# Altium PCB Payload_ProbablyStable.PcbDoc
Units mm, origin at the board's own origin, x right, y up, seen from the top; angles counter-clockwise.
Board outline 47.6 x 56 mm, 2 copper layers (Top Layer, Bottom Layer); 28 components, 33 nets, 124 pads, 42 vias.
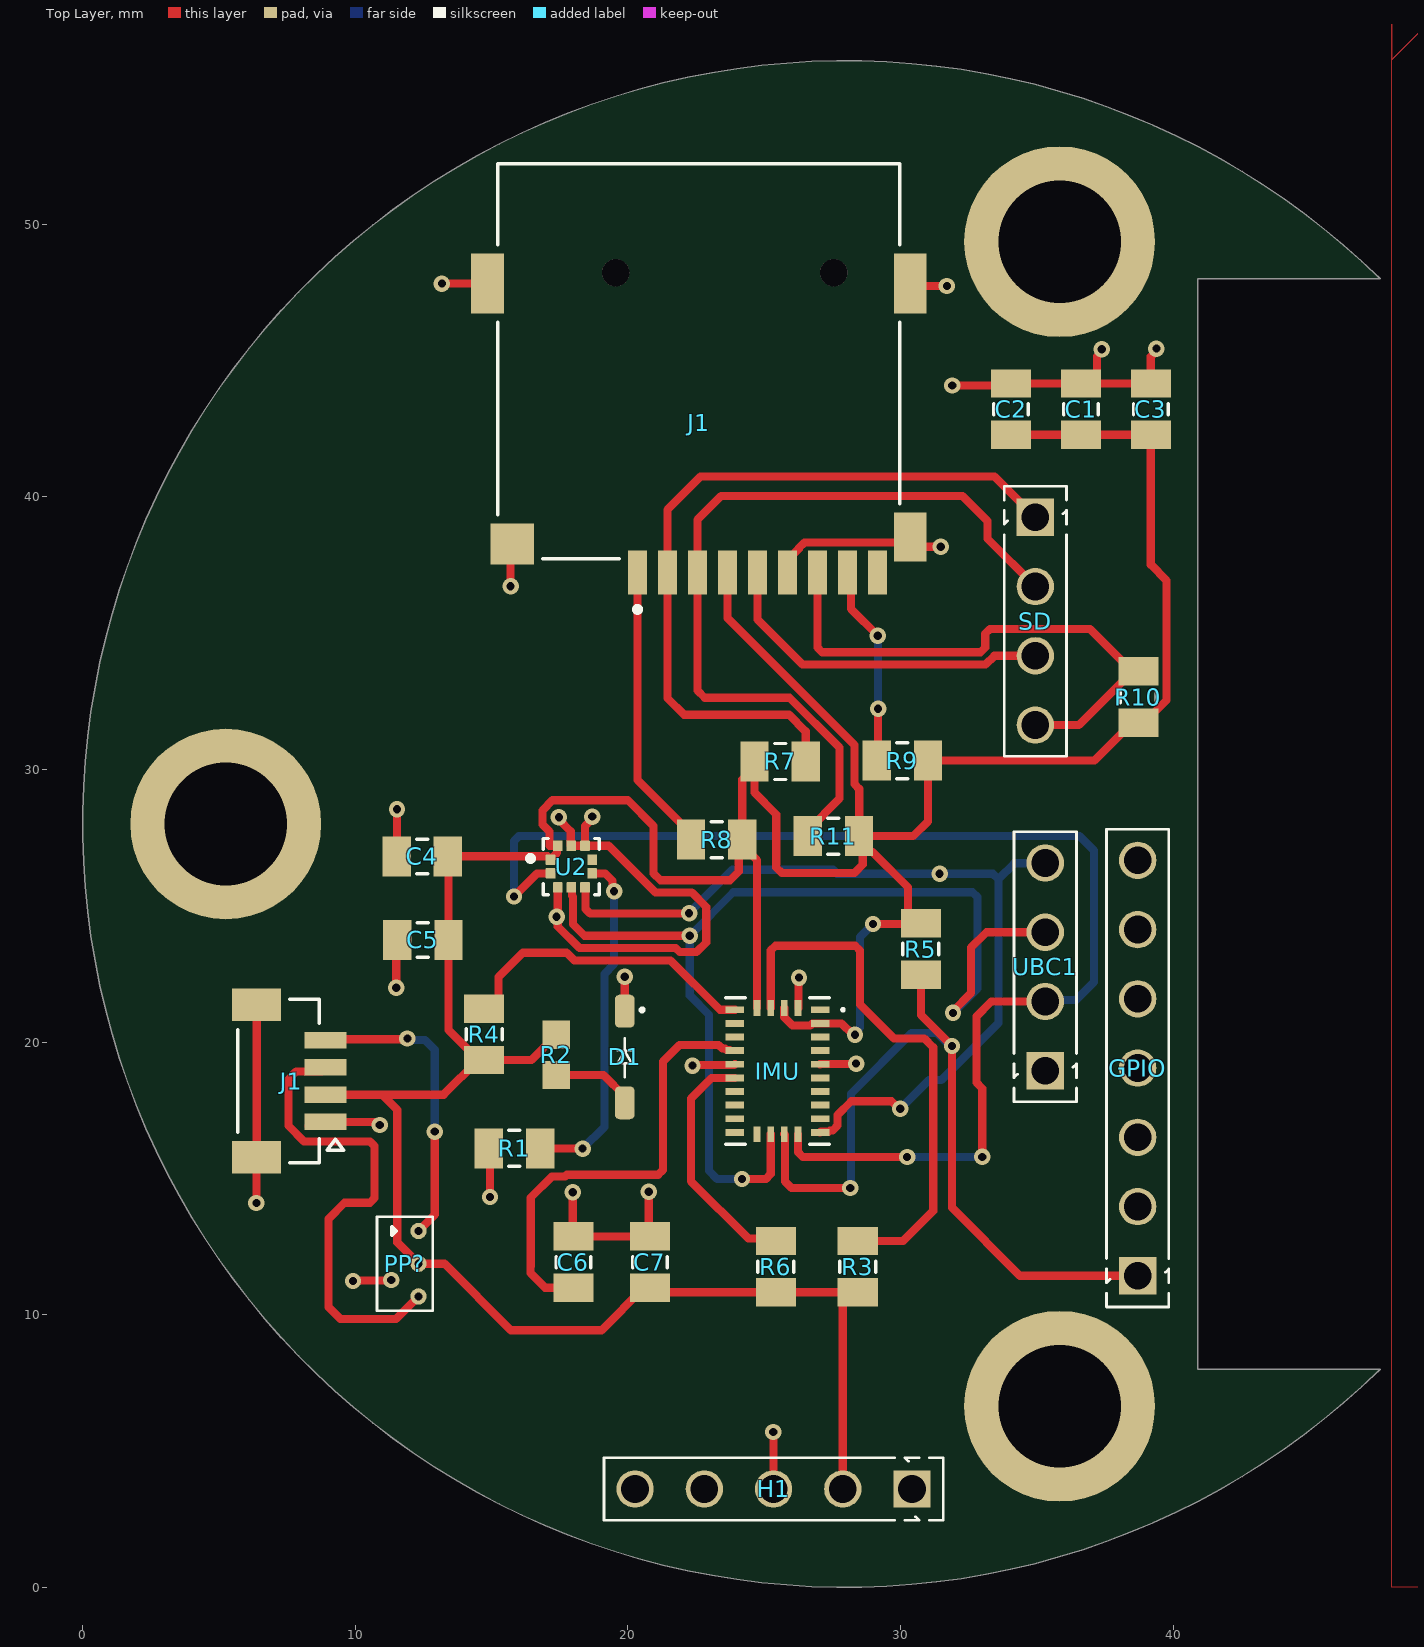
[diagram p0: Top Layer view]
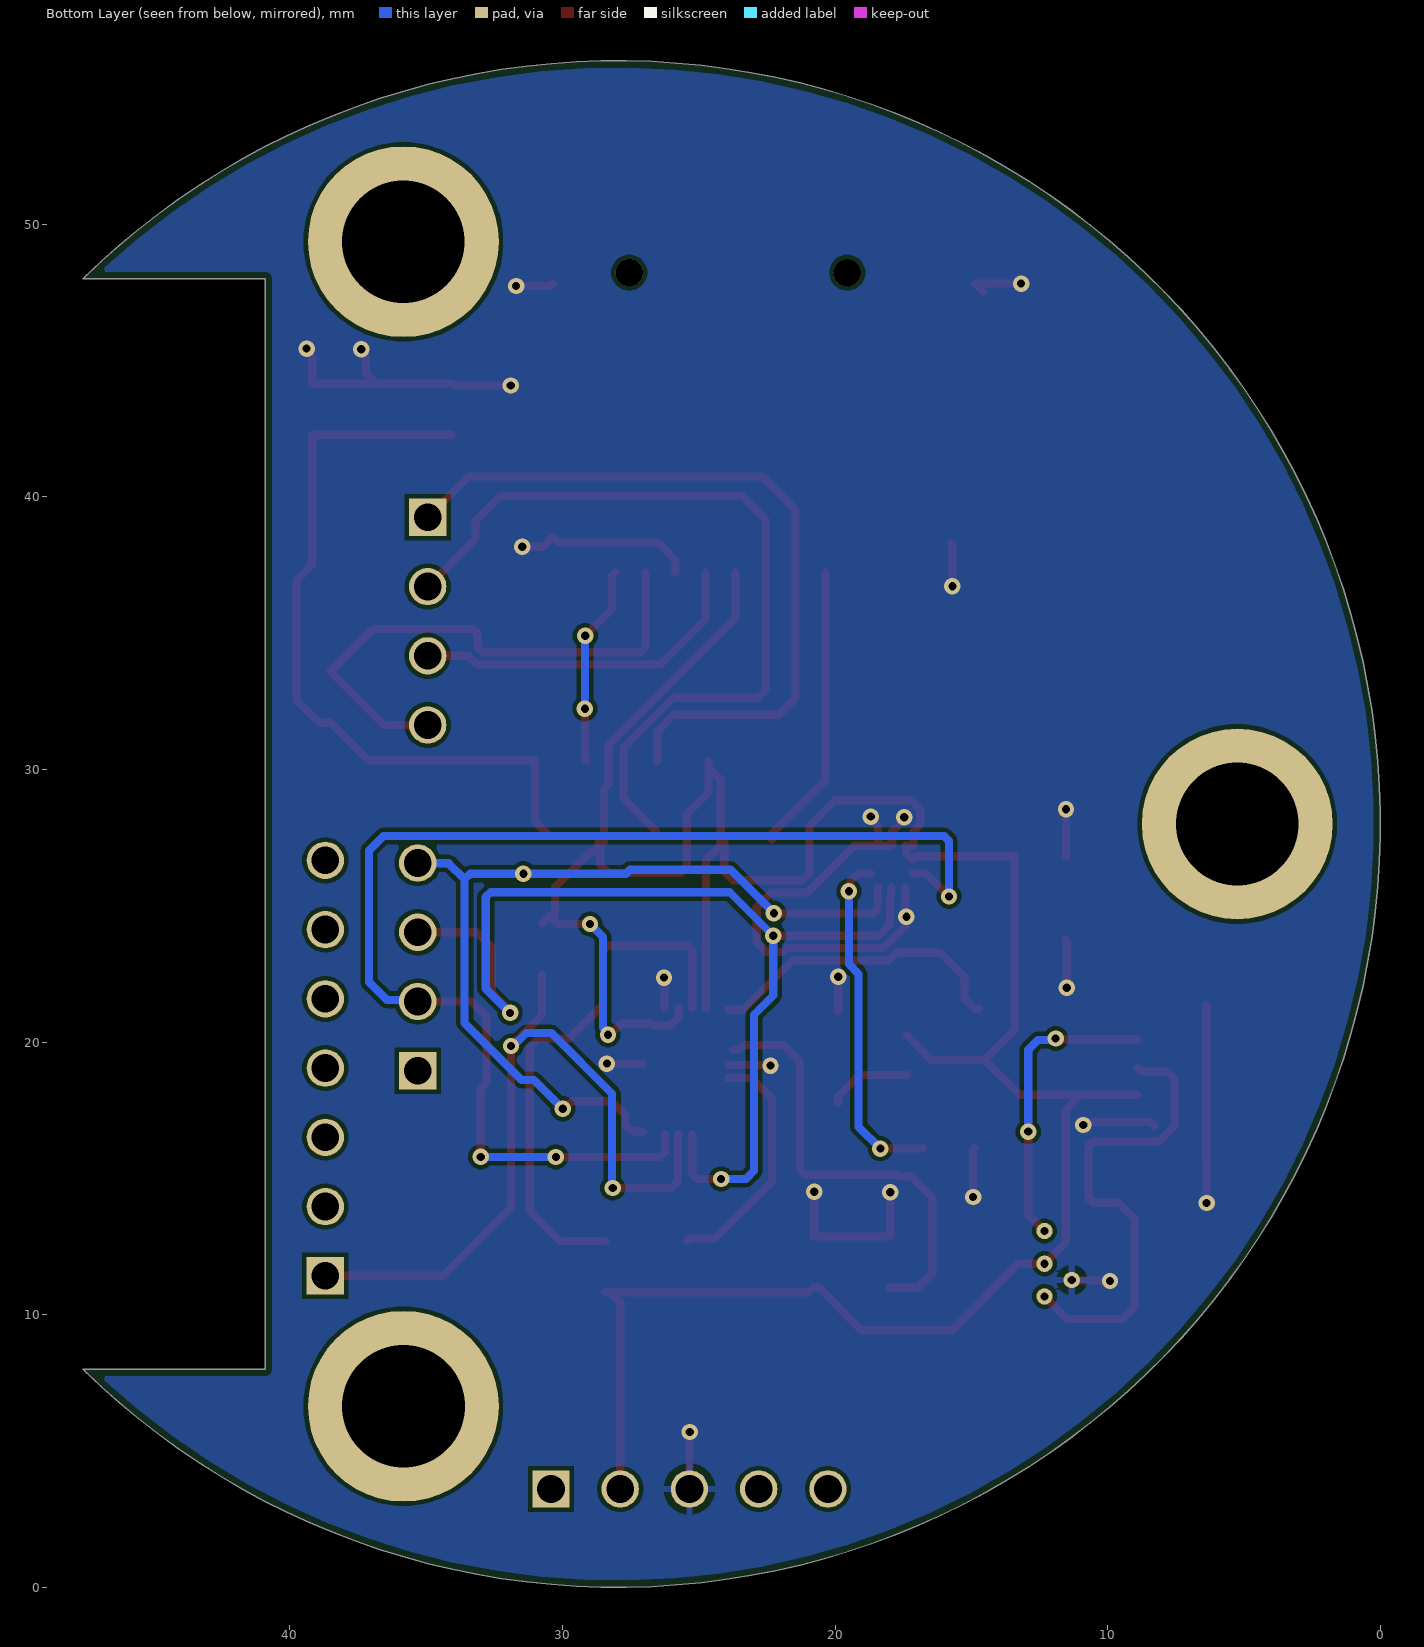
[diagram p1: Bottom Layer view, seen from below]

## Layer stack, top to bottom
Top Solder: solder mask 0.0102, Solder Resist, Dk 3.5
Top Layer: signal copper 0.0356
Dielectric 1: dielectric 0.32, FR-4, Dk 4.8
Bottom Layer: signal copper 0.0356
Bottom Solder: solder mask 0.0102, Solder Resist, Dk 3.5

## Board outline
47.596,8 cw(c28,28) 47.596,48 47.6,48 40.913,48 40.913,8

## Design rules (kind name [scope] priority, off if disabled: settings)
BoardOutlineClearance [All] p1: gap=0.254 ignorepadtopadclearanceinfootprint=FALSE except(0: Arc-SplitContinuation Track-SplitContinuation SMDPad-SplitContinuation THPad-SplitContinuation Via-SplitContinuation Fill-SplitContinuation Poly-SplitContinuation Region-SplitContinuation Text-SplitContinuation)
Clearance [All] p1: gap=0.152 ignorepadtopadclearanceinfootprint=FALSE
ComponentClearance [All] p1: gap=0.1 collisioncheckmode=3 verticalgap=0.254 showdistances=FALSE
HoleSize [All] p1: absolutevalues=TRUE maxlimit=6.2 minlimit=0.3 maxpercent=80.000 minpercent=20.000
MinimumAnnularRing [All] p1: minimumring=0.15
MinimumSolderMaskSliver [All] p1: minsoldermaskwidth=0.1
PolygonConnect ViaConnect [IsVia] p1: connectstyle=Direct reliefconductorwidth=0.254 reliefentries=4 polygonreliefangle="90 Angle" airgapwidth=0.254
PolygonConnect [All] p2: connectstyle=Relief reliefconductorwidth=0.254 reliefentries=4 polygonreliefangle="90 Angle" airgapwidth=0.254
RoutingVias [All] p1: holewidth=0.3 width=0.6 viastyle="Through Hole" minholewidth=0.3 minwidth=0.5 maxholewidth=1 maxwidth=5
SilkToSilkClearance [All] p1: silktosilkclearance=0.1
SilkToSolderMaskClearance [IsPad] p1: minsilkscreentomaskgap=0.1 clearancetoexposedcopper=TRUE
SolderMaskExpansion [All] p1: expansion=0.051 istentingtop=FALSE
SupplyNets "Schematic Supply Nets_3" [InNet('P6.3 / BARO_INT')] p1: voltage=0.000
SupplyNets "Schematic Supply Nets_27" [InNet('Reset/SBW_TDIO')] p2: voltage=0.000
SupplyNets "Schematic Supply Nets_26" [InNet('SBW_TCK')] p3: voltage=0.000
SupplyNets "Schematic Supply Nets_25" [InNet('SD_MISO')] p4: voltage=0.000
SupplyNets "Schematic Supply Nets_24" [InNet('SD_CLK')] p5: voltage=0.000
SupplyNets "Schematic Supply Nets_23" [InNet('GPIO2.7')] p6: voltage=0.000
SupplyNets "Schematic Supply Nets_22" [InNet('UCB1_STE')] p7: voltage=0.000
SupplyNets "Schematic Supply Nets_21" [InNet('P1.4 / SD_CS')] p8: voltage=0.000
SupplyNets "Schematic Supply Nets_20" [InNet('GPIO3.6')] p9: voltage=0.000
SupplyNets "Schematic Supply Nets_19" [InNet('P3.5 / SD_CardDetect')] p10: voltage=0.000
SupplyNets "Schematic Supply Nets_18" [InNet('GPIO3.7')] p11: voltage=0.000
SupplyNets "Schematic Supply Nets_17" [InNet('GPIO2.6')] p12: voltage=0.000
SupplyNets "Schematic Supply Nets_16" [InNet('GPIO6.0')] p13: voltage=0.000
SupplyNets "Schematic Supply Nets_15" [InNet('SD_MOSI')] p14: voltage=0.000
SupplyNets "Schematic Supply Nets_14" [InNet('GPIO6.1')] p15: voltage=0.000
SupplyNets "Schematic Supply Nets_13" [InNet('UCB1_CLK')] p16: voltage=0.000
SupplyNets "Schematic Supply Nets_11" [InNet('UCB1_MISO/SCL')] p17: voltage=0.000
SupplyNets "Schematic Supply Nets_10" [InNet('P6.2 / BMP_ADR')] p18: voltage=0.000
SupplyNets "Schematic Supply Nets_9" [InNet('GPIO2.3')] p19: voltage=0.000
SupplyNets "Schematic Supply Nets_7" [InNet('P3.6')] p20: voltage=0.000
SupplyNets "Schematic Supply Nets_6" [InNet('Vbat')] p21: voltage=0.000
SupplyNets "Schematic Supply Nets_5" [InNet('3V3')] p22: voltage=0.000
SupplyNets "Schematic Supply Nets_4" [InNet('UCB1_MOSI/SDA')] p23: voltage=0.000
SupplyNets "Schematic Supply Nets_2" [InNet('5V')] p24: voltage=0.000
SupplyNets "Schematic Supply Nets_1" [InNet('1V8')] p25: voltage=0.000
SupplyNets "Schematic Supply Nets" [InNet('GND')] p26: voltage=0.000
Width [All] p1: maxlimit=25.4 minlimit=0.15 preferedwidth=0.3
25 further rules are at their usual default settings.

## Classes and differential pairs
component class Payload: C1 C2 C3 C4 C5 C6 C7 D1 GPIO H1 IMU PP? R1 R2 R3 R4 R5 R6 R7 R8 R9 R10 R11 SD U2 UBC1

## Components (designator, comment, footprint, x,y, rotation, side; value= is the part's Value field where it differs from the comment)
C1 "22uF" CAPACITOR_0805_2012M-70N 36.624,43.218 r270 top
C2 "22uF" CAPACITOR_0805_2012M-70N 34.055,43.22 r270 top
C3 "22uF" CAPACITOR_0805_2012M-70N 39.182,43.218 r270 top
C4 "0.1uF" CAPACITOR_0805_2012M-70N 12.459,26.814 r0 top
C5 "0.1uF" CAPACITOR_0805_2012M-70N 12.48,23.751 r0 top
C6 "0.1uF" CAPACITOR_0805_2012M-70N 18.001,11.932 r270 top
C7 "0.1uF" CAPACITOR_0805_2012M-70N 20.807,11.932 r270 top
D1 "1N4148W-TP" SOD123-1.35mm-N 19.886,19.453 r270 top
GPIO "0530470710" HEADER_2.54MM_1x7PIN 38.702,19.047 r90 top
H1 "SSQ-105-03-S-S" HEADER_2.54MM_1x5PIN 25.344,3.607 r180 top
IMU "BNO085" IC_BNO085 25.489,18.937 r270 top
J1 "MSD-4-A" CUI_MSD-4-A 22.603,44.974 r180 top
J1 "5015680407" MOLEX_5013310407 7.37,18.571 r270 top
PP? "Headerless Pogo Holes 4-pin" POGO_4_PIN_HEADER 11.82,11.872 r270 top
R1 "10K" Resistor_0805_2012M-50N 15.84,16.103 r0 top
R2 "10K" RESC1607X60N 17.373,19.529 r90 top
R3 "10K" Resistor_0805_2012M-50N 28.434,11.765 r90 top
R4 "10K" Resistor_0805_2012M-50N 14.73,20.284 r90 top
R5 "10K" Resistor_0805_2012M-50N 30.751,23.414 r270 top
R6 "10K" Resistor_0805_2012M-50N 25.427,11.766 r270 top
R7 "4.7k" Resistor_0805_2012M-50N 25.583,30.293 r180 top
R8 "4.7k" Resistor_0805_2012M-50N 23.258,27.429 r0 top
R9 "4.7k" Resistor_0805_2012M-50N 30.07,30.328 r0 top
R10 "4.7k" Resistor_0805_2012M-50N 38.723,32.657 r270 top
R11 "4.7k" Resistor_0805_2012M-50N 27.54,27.554 r0 top
SD "Header 4" HEADER_2.54MM_1x4PIN 34.946,35.44 r270 top
U2 "BMP388" PQFN50P200X200X80-10N 17.928,26.439 r0 top
UBC1 "Header 4" HEADER_2.54MM_1x4PIN 35.311,22.76 r90 top

## Footprints (in the part's own frame and the unit in brackets; to place one, negate y for a bottom-side part, rotate by r counter-clockwise, add the part's x,y. Pads: shape width x height; smd on the part's side, far side on the other; paste and mask are expansions set on the pad)
CAPACITOR_0805_2012M-70N [mm] "Capacitor, 0805 (2012 metric), 0.7mm high, nominal pads,"
  rect 1.04x1.47 smd mask+0.051: 1(-0.94,0) 2(0.94,0)
  silkscreen extent -0.2,-0.64 0.2,0.64, body extent -1,-0.73 1,0.73, height 1.23
CUI_MSD-4-A [mm]
  rect 0.7x1.6 smd: 1(2.25,7.75) 2(1.15,7.75) 3(0.05,7.75) 4(-1.05,7.75) 5(-2.15,7.75) 6(-3.25,7.75) 7(-4.35,7.75) 8(-5.45,7.75) CD(-6.55,7.75)
  rect 1.2x1.8 smd: G1(-7.75,6.45)
  rect 1.6x1.5 smd: G2(6.85,6.7)
  rect 1.2x2.2 smd: G3(-7.75,-2.85) G4(7.75,-2.85)
  round 1 hole 1 unplated: ""(-4.95,-3.25) ""(3.05,-3.25)
  silkscreen extent -7.37,-7.25 7.37,9.2, body extent -0.63,0 15.52,15.05, height 1.8
HEADER_2.54MM_1x4PIN [mm]
  rect 1.37x1.37 hole 1.02: 1(-3.81,0)
  round 1.37 hole 1.02: 2(-1.27,0) 3(1.27,0) 4(3.81,0)
  silkscreen extent -4.95,-1.14 4.95,1.14, body extent -4.95,-1.14 4.95,1.14, height 8.2
HEADER_2.54MM_1x5PIN [mm]
  rect 1.37x1.37 hole 1.02: 1(-5.08,0)
  round 1.37 hole 1.02: 2(-2.54,0) 3(0,0) 4(2.54,0) 5(5.08,0)
  silkscreen extent -6.22,-1.14 6.22,1.14, body extent -6.21,-1.14 6.22,1.14, height 8.2
HEADER_2.54MM_1x7PIN [mm]
  rect 1.37x1.37 hole 1.02: 1(-7.62,0)
  round 1.37 hole 1.02: 2(-5.08,0) 3(-2.54,0) 4(0,0) 5(2.54,0) 6(5.08,0) 7(7.62,0)
  silkscreen extent -8.76,-1.14 8.76,1.14, body extent -8.76,-1.14 8.76,1.14, height 8.2
IC_BNO085 [mm]
  rect 0.25x0.675 smd: 1(-2.25,1.562) 6(-2.25,-1.562) 7(-1.75,-1.562) 8(-1.25,-1.562) 9(-0.75,-1.562) 10(-0.25,-1.562) 11(0.25,-1.562) 12(0.75,-1.562) 13(1.25,-1.562) 14(1.75,-1.562) 15(2.25,-1.562) 20(2.25,1.562) 21(1.75,1.562) 22(1.25,1.562) 23(0.75,1.562) 24(0.25,1.562) 25(-0.25,1.562) 26(-0.75,1.562) 27(-1.25,1.562) 28(-1.75,1.562)
  rect 0.575x0.25 smd: 2(-2.312,0.75) 3(-2.312,0.25) 4(-2.312,-0.25) 5(-2.312,-0.75) 16(2.312,-0.75) 17(2.312,-0.25) 18(2.312,0.25) 19(2.312,0.75)
  silkscreen extent -2.69,-1.9 2.69,2.45, body extent -2.6,-1.9 2.6,1.9, height 1.18
MOLEX_5013310407 [mm] "Header - Picoclasp 04-pin, SMT, STR, 5.54mm height"
  rect 0.6x1.55 smd mask+0.076: 1(1.5,1.54) 2(0.5,1.54) 3(-0.5,1.54) 4(-1.5,1.54)
  rect 1.2x1.8 smd mask+0.076: MP1(2.8,-0.985) MP2(-2.8,-0.985)
  silkscreen extent -3,-1.68 3,2.2, body extent -3.12,-1.92 3.12,1.92, height 5.54
POGO_4_PIN_HEADER [mm] "4-pin header for pogo pins"
  round 0.6 hole 0.3 mask+0.051: 1(-1.2,0.5) 2(0,0.5) 3(0.6,-0.5) 4(1.2,0.5)
  silkscreen extent -1.73,-1.02 1.72,1.03
PQFN50P200X200X80-10N [mm]
  rrect9% 0.35x0.38 smd: 1(-0.765,0.25) 2(-0.765,-0.25) 3(-0.5,-0.765) 4(0,-0.765) 5(0.5,-0.765) 6(0.765,-0.25) 7(0.765,0.25) 8(0.5,0.765) 9(0,0.765) 10(-0.5,0.765)
  silkscreen extent -1.6,-1.03 1.03,1.03
RESC1607X60N [mm]
  rect 1.04x1.02 smd: 1(-0.735,0) 2(0.735,0)
  body extent -0.8,-0.4 0.8,0.4, height 0.55
Resistor_0805_2012M-50N [mm] "Resistor, 0805 (2012 metric), nominal pads"
  rect 1.04x1.47 smd mask+0.051: 1(-0.94,0) 2(0.94,0)
  silkscreen extent -0.2,-0.66 0.2,0.66, body extent -1,-0.63 1,0.62, height 0.5
SOD123-1.35mm-N [mm] "SOD-123, 1.35mm high, nominal pads"
  rrect50% 1.21x0.73 smd mask+0.051: A(1.68,0) C(-1.68,0)
  silkscreen extent -1.75,-0.25 0.74,0.66, body extent -1.83,-0.78 1.82,0.77, height 1.5

## Part data
C1 C2 C3 C4 C5 C6 C7: library part GRM21BR61C226ME44L, "Passive - Capacitor, X5R, 22uF Max, 16V, 0805 (2012 Metric), ±20%, -55°C ~ 85°C. 9.4uF @ 5V, 3.2uF @ 15V, 1.9uF @ 25V", Capacitance at Rated Voltage=10%, Package=0805, Rated Voltage=16V, Supplier 1 Part No.=490-10747-1-ND, Temp Range="-55°C ~ 85°C", Temperature Coefficient=X5R, Tolerance=±20%, APSS Standard Part="APSS Standard", MF Part No.=GRM21BR61C226ME44L, Supplier 1=Digikey
D1: "Diode - Low Reverse Leakage, 1.25 Vf @ 150 mA, 1 µA Reverse @ 75 V, SOD-123", Package=SOD-123, Rated Voltage="100V Reverse", Supplier 1 Part No.=1N4148WTPMSCT-ND, Temp Range="-65°C ~ 150°C", APSS Standard Part="APSS Standard", MF Part No.=1N4148W-TP, Supplier 1=Digikey
GPIO: "Connector - Picoblade 07-pin, TH, STR", Supplier 1 Part No.=WM1736-ND, APSS Standard Part="APSS Standard", MF Part No.=0530470710, Mounting Type=Through-hole, Orientation=Straight, Pins=7, Pitch=1.25mm, Supplier 1=Digikey
H1: Package=None, Availability=Unavailable, MF="{'manufacturer': u'Samtec Inc.'}", MP=SSQ-105-03-S-S, Price=None
IMU: "Accelerometer, Gyroscope, Magnetometer, 9 Axis Sensor IÂ²C, SPI, UART Output", Package="TFLGA-28 Hillcrest Laboratories", Check_prices=https://www.snapeda.com/parts/BNO085/Hillcrest+Laboratories%252C+Inc./view-part/?ref=eda, MF="Hillcrest Laboratories,", MP=BNO085, SnapEDA_Link=https://www.snapeda.com/parts/BNO085/Hillcrest+Laboratories%252C+Inc./view-part/?ref=snap
J1: "Micro SD Card Connector, 9 Positions, Connector and Ejector, Push In, Auto Eject Out, Surface Mount, 1.8 mm Height Above Board, Gold Flash", Package=None, Check_prices=https://www.snapeda.com/parts/MSD-4-A/Same+Sky/view-part/?ref=eda, MF="Same Sky", MP=MSD-4-A, SnapEDA_Link=https://www.snapeda.com/parts/MSD-4-A/Same+Sky/view-part/?ref=snap
J1: "Connector - Picoclasp  04-pin, SMT, RA", Supplier 1 Part No.=WM7895CT-ND, APSS Standard Part="APSS Standard", MF Part No.=5015680407, Mounting Type="Surface Mount", Orientation=Straight, Pins=4, Pitch=1mm, Supplier 1=Digikey
R1 R2 R3 R4 R5 R6: library part "RMCF0805JT Series", "Passive - Resistor Series, 0805, 5%, 100m - 22M, E24, 0.063W, 1/16W, ±200ppm/°C, -55°C ~ 155°C, 0805 (2012 Metric)", Package=0805, Power=1/8W, Rated Voltage=150V, Temp Range="-55°C ~ 155°C", Temperature Coefficient=±200ppm/°C, Tolerance=5%, Value Range="100m ~ 22M", APSS Standard Part="APSS Standard", E Series=E24, Supplier 1=Digikey
R7 R8 R9 R10 R11: library part "RMCF0805JT Series", "Passive - Resistor Series, 0805, 5%, 100m - 22M, E24, 0.063W, 1/16W, ±200ppm/°C, -55°C ~ 155°C, 0805 (2012 Metric)", MF Part No.=RMCF0805JT1K00, Package=0805, Power=1/8W, Rated Voltage=150V, Temp Range="-55°C ~ 155°C", Temperature Coefficient=±200ppm/°C, Tolerance=5%, Value Range="100m ~ 22M", APSS Standard Part="APSS Standard", E Series=E24, Supplier 1=Digikey
SD UBC1: "Header, 4-Pin"
U2: "P-Sensor SPI I2C 1, 25 Bar SMD", Package=None, Availability=Unavailable, MP=BMP388, Price=None

## Free pads (board coordinates)
  round 7 hole 4.5: 1(5.25,28) 1(35.837,6.643) 1(35.837,49.357)

## Via types
v1: diameter 0.6, hole 0.3, Top Layer to Bottom Layer, 42 vias

## Nets (pads, with @x,y where several pads share a name; then routed paths per layer and width w, separated by ;. In a path a pad name is that pad's centre, name@x,y a point inside that pad or via, vN(x,y) a via of type N, cw(c..) or ccw(c..) an arc to the next point about the centre after c; other vN are vias at no path point)
1V8: H1.1
3V3: C1.2 C2.2 C3.2 C4.2 C5.2 C7.2 H1.2 IMU.3 IMU.5 IMU.28 J1.2@8.91,18.071 J1.4@23.653,37.224 PP?.2 R2.2 R3.1 R4.1 R5.1 R6.2 R7.2 R8.2 R9.2 R10.2 R11.2 U2.1 U2.10 | length 139
  Top Layer w0.3: J1.2@8.91,18.071 10.979,18.071 ; U2.1 U2.1@17.163,26.704 ; R2.2 17.373,20.254 16.462,19.344 R4.1 R4.1@14.515,19.344 ; C7.2 20.592,10.992 19.028,9.428 15.712,9.428 13.268,11.872 PP?.2 11.542,12.649 11.542,17.508 10.979,18.071 ; C7.2@20.973,10.826 R6.2 R6.2 R3.1@28.254,10.825 ; J1.4@23.653,37.224 23.653,35.549 28.308,30.895 28.308,29.468 28.485,29.291 28.485,27.559 R11.2 ; R7.2 R7.2@24.643,30.078 ; IMU.5 24.739,26.673 24.198,27.214 R8.2 ; IMU.3 25.739,20.909 26.034,20.614 26.693,20.614 26.766,20.687 IMU.28 27.839,20.687 28.255,20.271 v1(28.332,20.271) ; H1.2 27.884,10.455 R3.1@28.254,10.825 ; R3.1 R3.1@28.254,10.825 ; v1(28.993,24.332) 30.166,24.332 30.335,24.501 R5.1@30.335,24.66 ; R5.1 30.446,24.66 R5.1@30.335,24.66 ; C2.2 34.057,42.278 C1.2 C3.2 39.182,37.513 39.761,36.934 39.761,32.539 38.938,31.717 R10.2 38.508,31.717 37.12,30.328 R9.2 31.01,28.095 30.47,27.554 R11.2 ; 10.979,18.071 13.243,18.071 R4.1@14.515,19.344 ; R4.1@14.515,19.344 13.42,20.439 C5.2 13.42,26.792 C4.2 17.052,26.814 U2.1@17.163,26.704 ; U2.1@17.163,26.704 17.403,26.944 17.403,27.179 U2.10 17.123,27.204 17.123,27.723 16.866,27.98 16.866,28.499 17.241,28.874 19.997,28.874 20.943,27.928 20.943,26.189 21.195,25.936 23.749,25.936 24.067,26.254 24.067,27.298 R8.2 ; R8.2 24.198,29.632 R7.2@24.643,30.078 ; R7.2@24.643,30.078 24.643,29.153 25.444,28.352 25.444,26.408 25.648,26.204 28.31,26.204 28.617,26.511 28.617,27.202 28.48,27.339 R11.2 ; R11.2 28.682,27.352 28.682,27.137 28.85,26.969 28.981,26.969 30.271,25.679 30.271,24.724 R5.1@30.335,24.66
  Bottom Layer w0.3: v1(28.332,20.271) 28.332,20.352 28.516,20.536 28.516,23.854 v1(28.993,24.332)
5V: H1.4
GND: C1.1 C2.1 C3.1 C4.1 C5.1 C6.1 C7.1 D1.C H1.3 IMU.2 IMU.10 IMU.25 J1.1@8.91,17.071 J1.6 J1.G1 J1.G2 J1.G3 J1.G4 J1.MP1 J1.MP2 PP?.3 R1.1 U2.3 U2.8 U2.9 | length 68.9
  Top Layer w0.3: v1(6.373,14.1) 6.373,15.759 J1.MP1 J1.MP2 ; J1.1@8.285,16.921 8.435,17.071 8.91,17.071 10.707,17.071 10.818,16.961 v1(10.899,16.961) ; v1(9.92,11.239) 9.936,11.255 11.303,11.255 PP?.3 ; v1(11.502,21.994) 11.502,23.713 C5.1 ; C4.1 11.534,26.829 v1(11.534,28.539) ; v1(13.178,47.823) J1.G4@14.852,47.823 ; J1.G4@14.562,47.532 J1.G4@14.852,47.823 ; J1.G4 J1.G4@14.852,47.823 ; R1.1 14.941,16.063 v1(14.941,14.32) ; v1(15.7,36.718) 15.7,38.22 J1.G2 J1.G2@15.703,38.274 ; U2.3 17.428,24.244 18.223,23.449 21.754,23.449 21.904,23.299 22.521,23.299 22.874,23.652 22.874,24.954 22.345,25.484 21.008,25.484 19.288,27.204 U2.8 ; v1(17.468,28.249) 17.468,28.168 17.905,27.731 17.905,27.226 U2.9 U2.8 ; v1(17.981,14.492) 17.981,12.892 C6.1 C7.1@20.647,12.872 ; v1(18.697,28.272) 18.697,28.19 18.428,27.922 U2.8 ; v1(19.883,22.394) 19.883,21.136 D1.C ; v1(20.764,14.509) 20.764,12.914 C7.1 ; v1(22.372,19.136) 22.398,19.162 23.902,19.162 IMU.10 ; v1(25.332,5.696) 25.338,5.69 25.338,3.612 H1.3 ; J1.6 25.853,37.674 26.266,38.087 26.266,38.114 26.478,38.326 30.156,38.326 J1.G1 30.708,38.17 v1(31.475,38.17) ; IMU.2@26.259,21.249 26.259,22.344 v1(26.278,22.363) ; IMU.25 27.064,19.199 28.36,19.199 v1(28.372,19.212) ; J1.G3 30.441,47.737 v1(31.703,47.737) ; v1(31.9,44.084) 33.98,44.084 C2.1 36.622,44.16 C1.1 C1.1@36.839,44.158 ; v1(37.386,45.416) 37.386,45.335 37.209,45.158 37.209,44.528 C1.1@36.839,44.158 ; v1(39.387,45.439) 39.387,45.358 39.182,45.153 C3.1 C1.1@36.839,44.158
  other v1: 17.386,24.598
GPIO2.3: GPIO.1 IMU.18 R5.2 | length 29.4
  Top Layer w0.3: IMU.18 25.764,16.599 25.764,14.885 26.002,14.647 v1(28.156,14.647) ; R5.2 30.751,20.995 v1(31.891,19.855) 31.891,13.926 34.39,11.427 GPIO.1
  Bottom Layer w0.3: v1@28.181,14.647 28.181,18.105 30.409,20.333 31.332,20.333 31.81,19.855 v1(31.891,19.855)
GPIO2.6: GPIO.7
GPIO2.7: GPIO.6
GPIO3.6: GPIO.2
GPIO3.7: GPIO.3
GPIO6.0: GPIO.4
GPIO6.1: GPIO.5
NetC6_2: C6.2 IMU.9 | length 16.6
  Top Layer w0.3: C6.2 16.964,10.992 16.425,11.53 16.425,11.779 16.436,11.791 16.436,14.292 17.21,15.066 17.703,15.066 17.772,15.135 21.114,15.135 21.29,15.311 21.29,19.29 21.893,19.893 23.33,19.893 23.464,19.759 23.568,19.759 23.616,19.712 IMU.9@23.739,19.712
NetD1_A: D1.A R2.1 | length 3.1
  Top Layer w0.3: R2.1 19.105,18.794 19.886,18.013 D1.A
NetIMU_4: IMU.4 R3.2 | length 20.1
  Top Layer w0.3: IMU.4 25.239,23.357 25.415,23.533 28.34,23.533 28.516,23.357 28.516,21.385 29.764,20.136 30.875,20.136 31.201,19.81 31.201,13.805 30.1,12.705 R3.2
NetIMU_6: IMU.6 R4.2 | length 11.4
  Top Layer w0.3: R4.2 14.89,21.224 15.26,21.594 15.26,22.389 16.151,23.28 17.752,23.28 18.036,22.997 21.567,22.997 23.377,21.187 IMU.6
NetIMU_11: IMU.11 R6.1 | length 9
  Top Layer w0.3: IMU.11 23.073,18.687 22.317,17.931 22.317,14.892 24.418,12.791 25.342,12.791 R6.1
NetJ1_1: J1.1@20.353,37.224 R8.1 | length 10.6
  Top Layer w0.3: J1.1@20.353,37.224 20.353,29.608 22.318,27.644 R8.1
NetJ1_8: J1.8 R9.1 | length 7.4
  Top Layer w0.3: J1.8 28.187,37.091 28.187,35.893 29.167,34.913 v1(29.167,34.903) ; R9.1 29.18,30.378 v1(29.18,32.23)
  Bottom Layer w0.3: v1(29.167,34.903) 29.174,34.896 29.174,32.237 v1(29.18,32.23)
"P1.4 / SD_CS": J1.2@21.453,37.224 R7.1 SD.1 | length 28.2
  Top Layer w0.3: R7.1 26.523,31.399 25.914,32.009 22.058,32.009 21.453,32.613 21.453,37.224 21.453,39.529 22.669,40.745 33.451,40.745 SD.1
"P3.5 / SD_CardDetect": J1.CD
P3.6: IMU.14
"P6.2 / BMP_ADR": R1.2 U2.6 | length 12.8
  Top Layer w0.3: R1.2 16.793,16.091 v1(18.34,16.091) ; U2.6 19.17,26.189 19.44,25.919 19.44,25.589 v1(19.497,25.531)
  Bottom Layer w0.3: v1(18.34,16.091) 19.138,16.889 19.138,22.501 19.497,22.86 v1(19.497,25.531)
"P6.3 / BARO_INT": U2.7
Reset/SBW_TDIO: J1.4@8.91,20.071 PP?.1 | length 11.1
  Top Layer w0.3: J1.4@8.91,20.071 8.94,20.101 11.883,20.101 v1(11.913,20.131) ; PP?.1 12.919,13.671 v1(12.919,16.717)
  Bottom Layer w0.3: v1(11.913,20.131) 11.97,20.074 12.562,20.074 12.919,19.717 v1(12.919,16.717)
SBW_TCK: J1.3@8.91,19.071 PP?.4 | length 17.7
  Top Layer w0.3: J1.3@8.91,19.071 8.76,18.921 7.832,18.921 7.547,18.636 7.547,16.932 8.12,16.358 10.535,16.358 10.711,16.183 10.711,14.283 10.535,14.107 9.61,14.107 9.021,13.518 9.021,10.275 9.452,9.844 11.492,9.844 PP?.4
SD_CLK: J1.5 SD.3 | length 12.7
  Top Layer w0.3: J1.5 24.753,35.496 26.402,33.848 33.12,33.848 33.443,34.17 SD.3
SD_MISO: J1.7 R10.1 SD.4 | length 20.1
  Top Layer w0.3: J1.7 26.953,34.476 27.129,34.3 32.933,34.3 33.109,34.476 33.109,34.982 33.284,35.158 36.948,35.158 38.508,33.597 36.542,31.63 SD.4
SD_MOSI: J1.3@22.553,37.224 R11.1 SD.2 | length 30.6
  Top Layer w0.3: R11.1 26.6,27.769 27.761,28.93 27.761,30.802 25.93,32.632 22.821,32.632 22.553,32.9 22.553,37.224 22.553,39.164 23.422,40.032 32.276,40.032 33.192,39.116 33.192,38.464 SD.2
UCB1_CLK: IMU.19 U2.2 UBC1.2 | length 47.7
  Top Layer w0.3: v1(15.824,25.342) 16.67,26.189 U2.2 ; IMU.19 26.239,15.961 26.415,15.785 v1(30.245,15.787) v1(30.245,15.787) ; v1(33.001,15.788) 33.001,18.301 32.787,18.515 32.787,20.946 33.331,21.49 UBC1.2
  Bottom Layer w0.3: v1(15.824,25.342) 15.824,27.381 15.999,27.557 36.571,27.557 37.097,27.031 37.097,22.2 36.446,21.549 35.371,21.549 UBC1.2 ; v1@30.245,15.788 v1(33.001,15.788)
UCB1_MISO/SCL: IMU.20 U2.5 UBC1.4 | length 32.7
  Top Layer w0.3: U2.5 18.441,25.66 18.441,24.888 18.617,24.712 22.23,24.712 v1(22.248,24.729) ; IMU.20 27.077,16.712 27.362,16.712 27.41,16.759 27.514,16.759 27.692,16.937 27.692,17.327 28.195,17.83 29.669,17.83 29.942,17.557 v1(29.995,17.557)
  Bottom Layer w0.3: v1(22.248,24.729) 23.842,26.324 27.524,26.324 27.674,26.174 v1(31.437,26.174) 33.395,26.174 33.593,25.976 ; v1(29.995,17.557) 31.048,18.61 31.498,18.61 33.593,20.705 33.593,25.976 ; UBC1.4 35.3,26.559 34.176,26.559 33.593,25.976
UCB1_MOSI/SDA: IMU.17 U2.4 UBC1.3 | length 40.2
  Top Layer w0.3: U2.4 17.95,25.651 17.95,25.367 17.989,25.329 17.989,24.323 18.41,23.902 v1(22.272,23.902) ; v1(24.184,14.98) 25.063,14.98 25.239,15.156 IMU.17 ; v1(31.925,21.071) 31.925,21.132 32.587,21.794 32.587,23.467 33.15,24.03 UBC1.3
  Bottom Layer w0.3: v1(24.184,14.98) 23.276,14.98 22.975,15.281 22.975,21.002 22.272,21.705 v1(22.272,23.902) 23.866,25.496 32.644,25.496 32.82,25.32 32.82,21.966 v1(31.925,21.071)
UCB1_STE: UBC1.1
Vbat: H1.5
pads on no net: IMU.1 IMU.7 IMU.8 IMU.12 IMU.13 IMU.15 IMU.16 IMU.21 IMU.22 IMU.23 IMU.24 IMU.26 IMU.27 J1.

## Polygon pours and split planes (outlines as drawn)
GND on Bottom Layer "GND_L02_P007" (solid, pour order 7): 0,56.297 1.417,57.714 56.993,57.714 56.993,3.204 53.789,0 0,0 0,57.098
GND on Top Layer "GND_L01_P006" (solid, pour order 6): 48.015,56.036 53.249,61.27 100.618,61.27 100.618,0.393 100.226,0 48.016,0 48.016,57.998 48.015,57.999

## Silkscreen, mask and mechanical layers (free items; w line width, h text height)
3D Models:
  text "This is an example payload" at 18.316,60.325 h1.52
  text "Feel free to use this as template" at 16.909,58.456 h1.52
  text "Battery cutout" at 46.173,24.284 h1.52 r90
Board Outline:
  the board outline again, w0.1
Courtyard:
  lines w0.254: 41.46,9.025 41.46,47.025 49.46,47.025 49.46,9.025 41.46,9.025